# Altium PCB SCMLI_Snipped.PcbDoc (part 1 of 5)
Units mil, origin at the board's own origin, x right, y up, seen from the top; angles counter-clockwise.
Board outline 12129 x 3278 mil, 4 copper layers (Top Layer, GNDPlane, PowRet, Bottom Layer), stack 25.6 mil thick; 452 components, 391 nets, 1786 pads, 827 vias.
Unrouted connection lines stored in the file: 1.
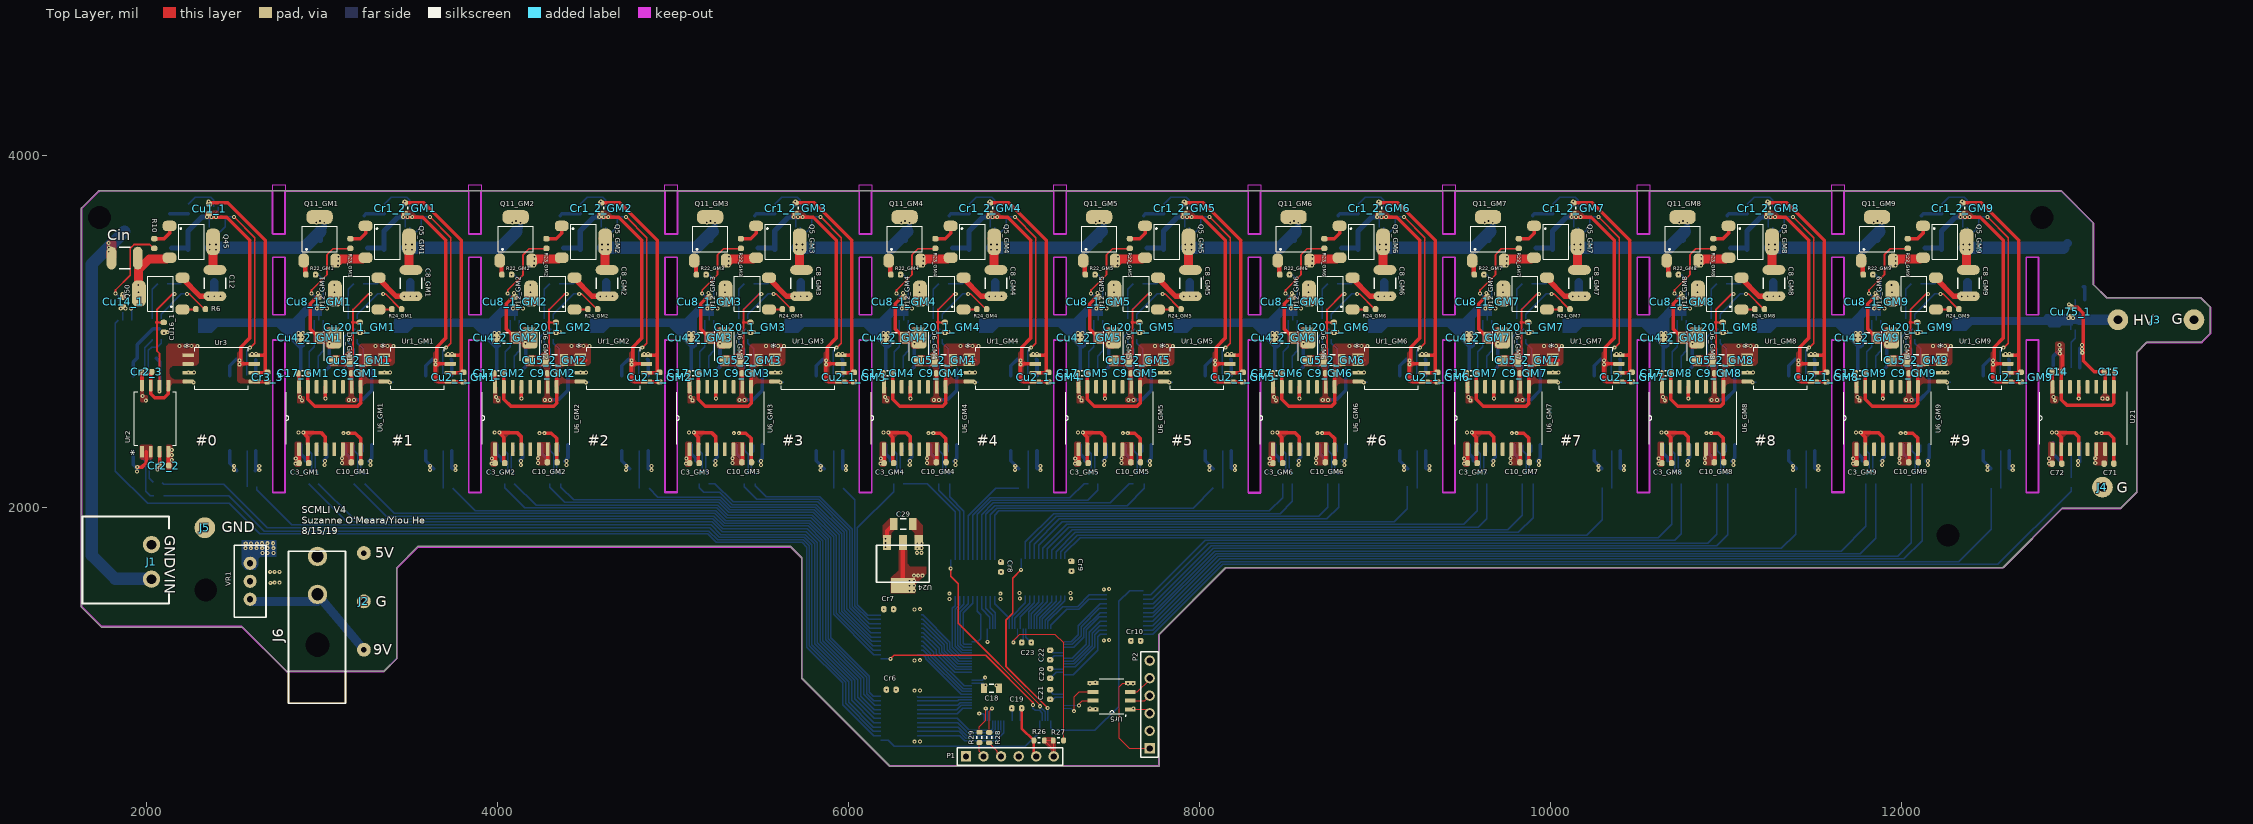
[diagram p0: Top Layer view]
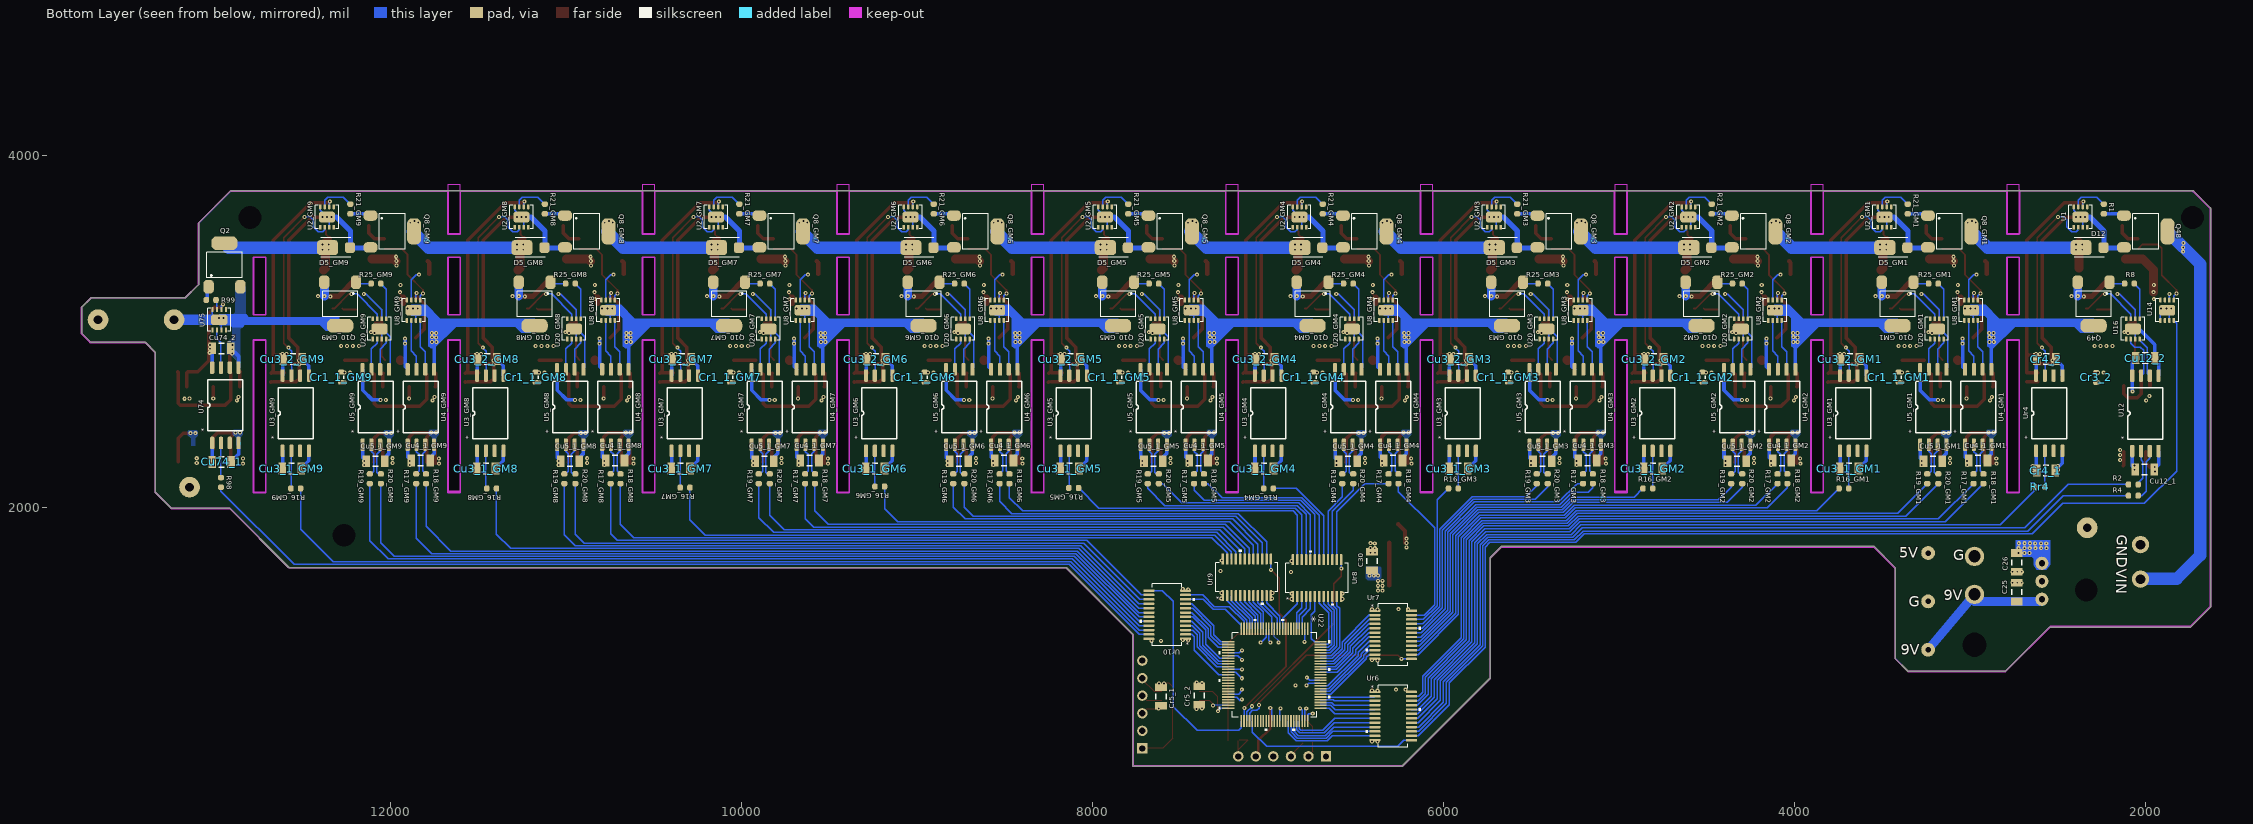
[diagram p1: Bottom Layer view, seen from below]
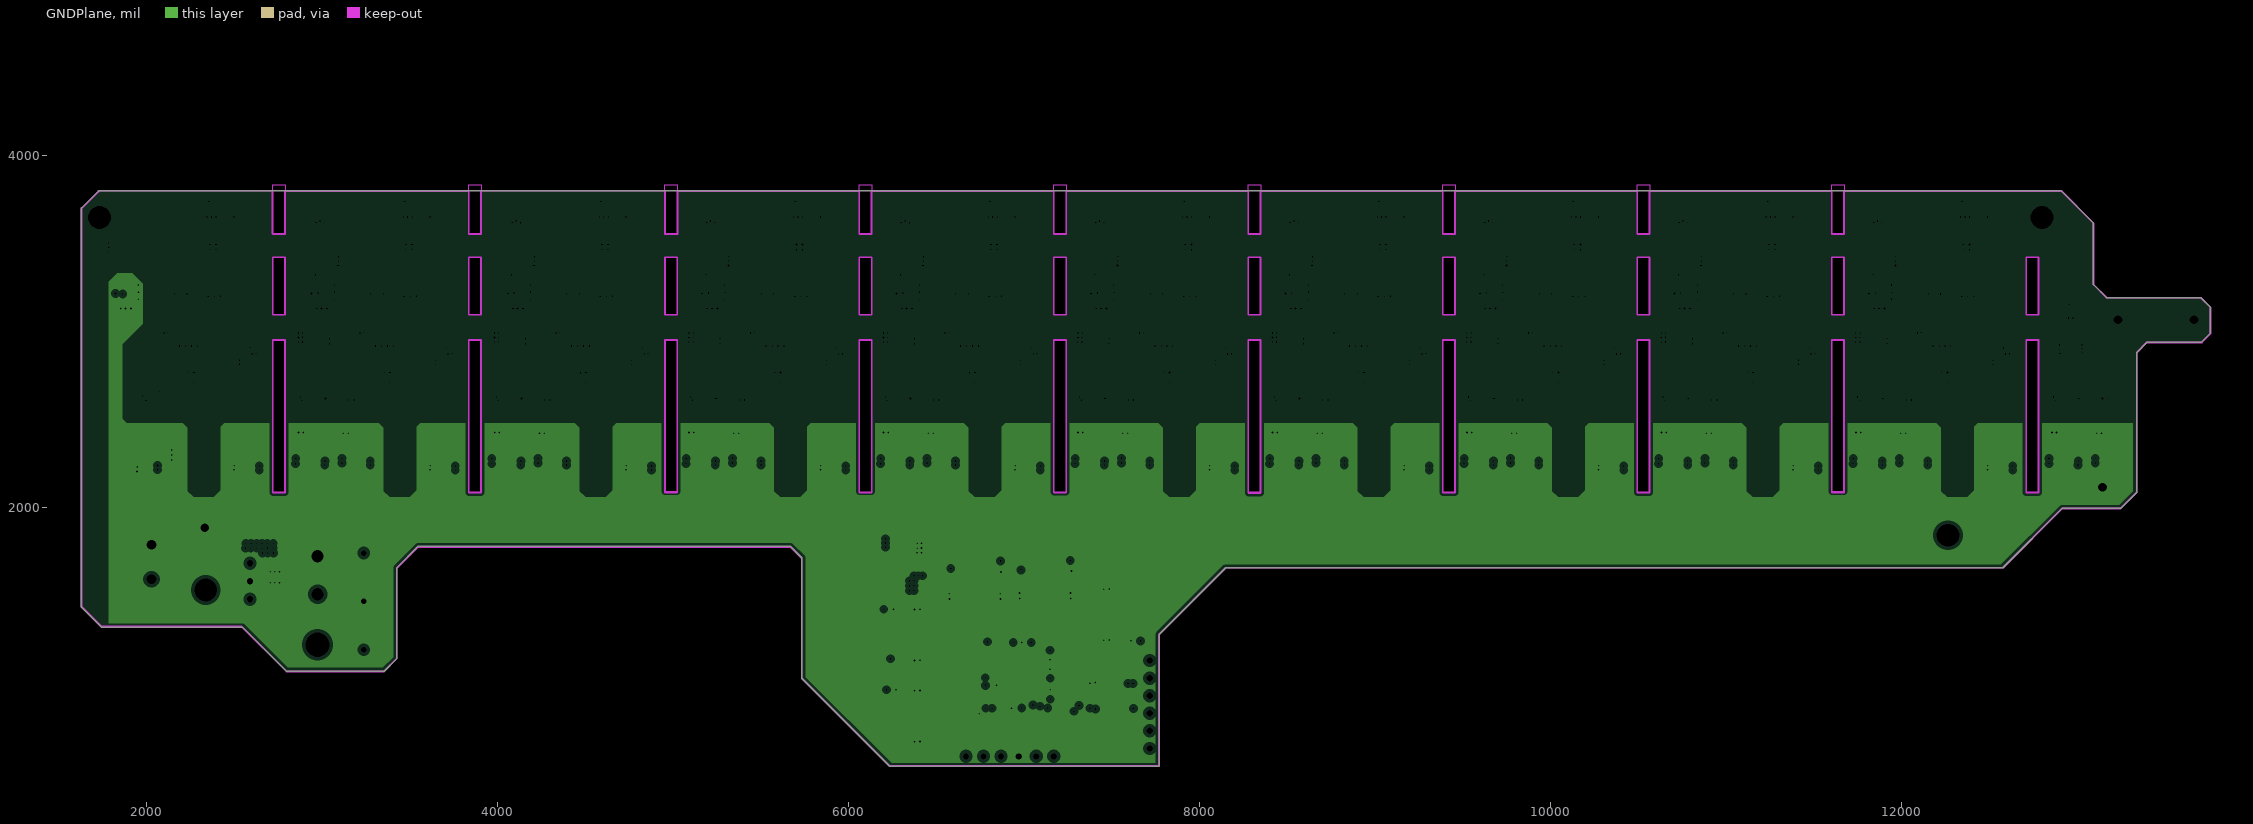
[diagram p2: GNDPlane, clearances drawn from the general rule]
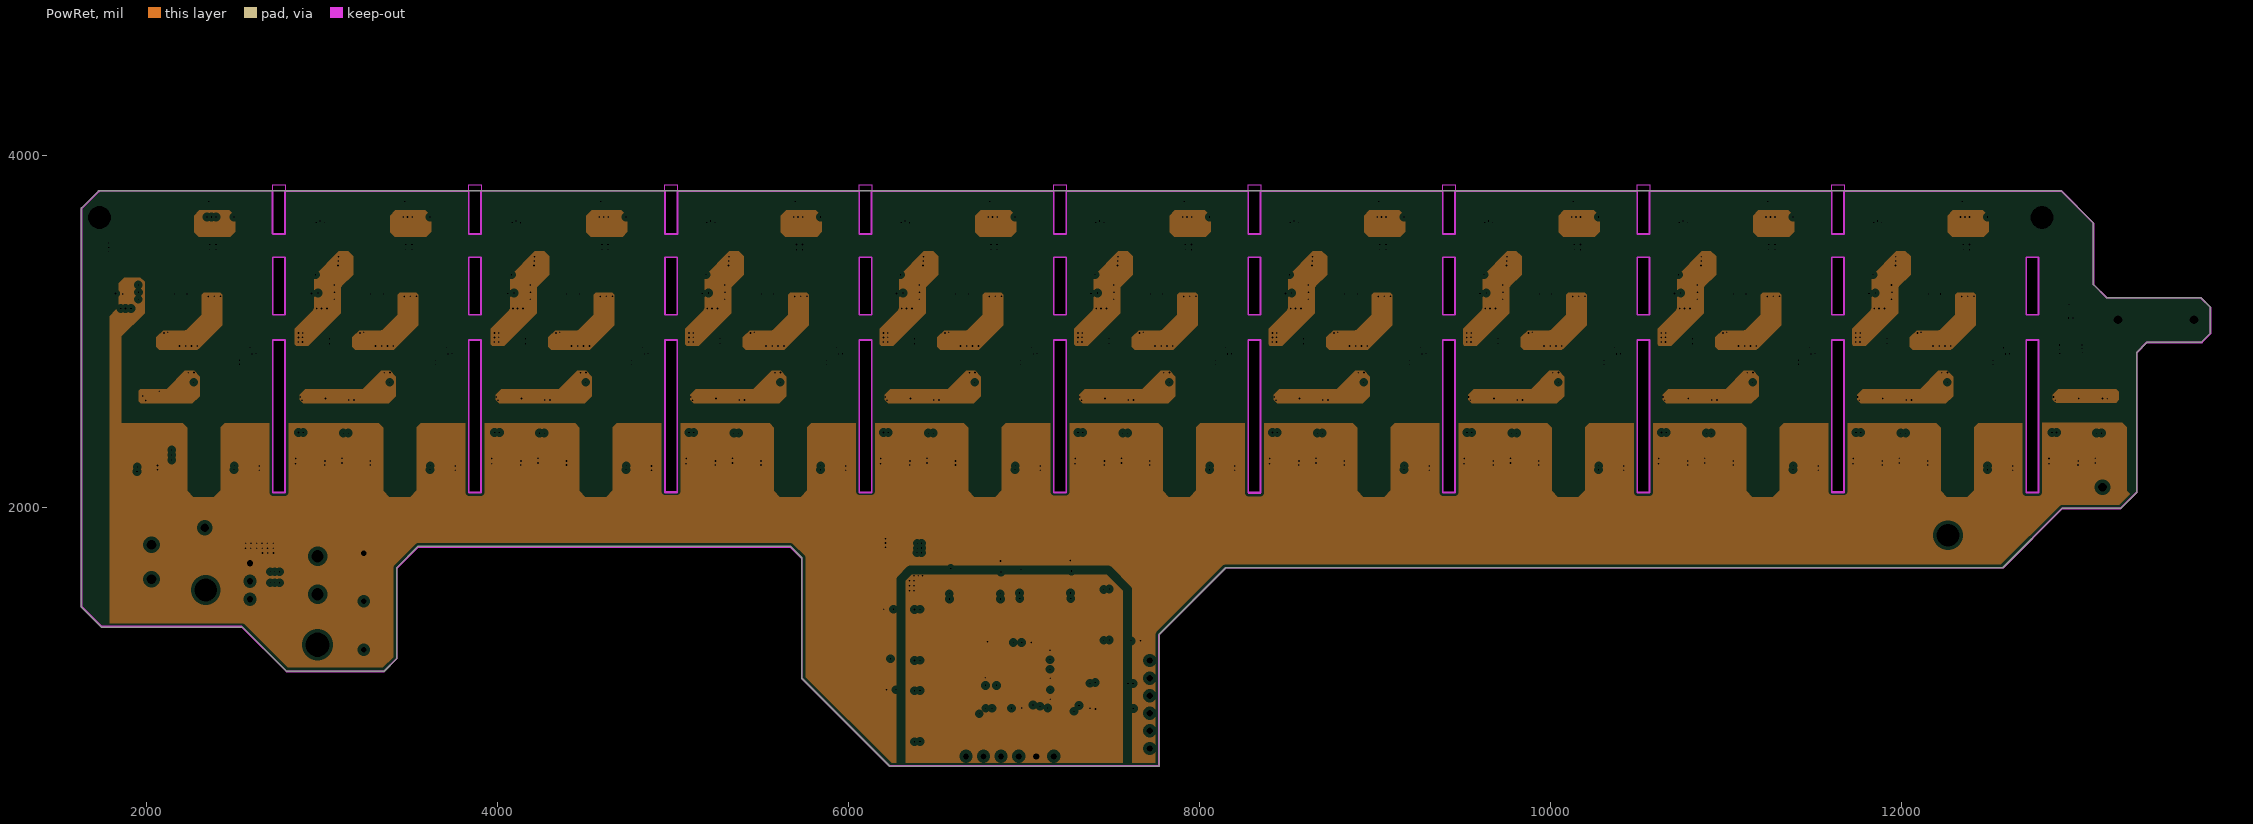
[diagram p3: PowRet, clearances drawn from the general rule]

## Layer stack, top to bottom
Top Solder: solder mask 0.4, Solder Resist, Dk 3.5
Top Layer: signal copper 1.4
Dielectric 1: core 10, FR-4, Dk 4.2
GNDPlane: plane copper 1.4, net GND
Dielectric2: prepreg 5, FR-4, Dk 4.2
PowRet: plane copper 1.4, net (Multiple Nets)
Dielectric 3: prepreg 5, Dk 4.2
Bottom Layer: signal copper 1.4
Bottom Solder: solder mask 0.4, Solder Resist, Dk 3.5

## Board outline
2799.06,1065 3355,1065 3427,1137 3427,1655 3548,1776 5669,1776 5734,1711 5734,1024 6235,523 7770,523 7770,1275 8149,1654 12576,1654 12914,1992 13248,1992 13339,2083 13339,2881 13396,2938 13705,2938 13759,2992 13759,3138 13704,3193 13167,3193 13093,3267 13093,3618 12910,3801 1727,3801 1630,3704 1630,1429 1743,1316 2548.06,1316
cut-out: 2720,3836 2790,3836 2790,3556 2720,3556
cut-out: 2720,3096 2790,3096 2790,3423 2720,3423
cut-out: 2720,2083 2790,2083 2790,2951 2720,2951
cut-out: 12710,3096 12780,3096 12780,3423 12710,3423
cut-out: 12710,2084 12780,2084 12780,2951 12710,2951
cut-out: 11602,3836 11672,3836 11672,3556 11602,3556
cut-out: 11602,3096 11672,3096 11672,3423 11602,3423
cut-out: 11602,2089 11672,2089 11672,2951 11602,2951
cut-out: 10494,3836 10564,3836 10564,3556 10494,3556
cut-out: 10494,3096 10564,3096 10564,3423 10494,3423
cut-out: 10494,2084 10564,2084 10564,2951 10494,2951
cut-out: 9386,3836 9456,3836 9456,3556 9386,3556
cut-out: 9386,3096 9456,3096 9456,3423 9386,3423
cut-out: 9386,2084 9456,2084 9456,2951 9386,2951
cut-out: 8278,3836 8348,3836 8348,3556 8278,3556
cut-out: 8278,3096 8348,3096 8348,3423 8278,3423
cut-out: 8278,2079 8348,2079 8348,2951 8278,2951
cut-out: 7170,3836 7240,3836 7240,3556 7170,3556
cut-out: 7170,3096 7240,3096 7240,3423 7170,3423
cut-out: 7170,2087 7240,2087 7240,2951 7170,2951
cut-out: 6062,3836 6132,3836 6132,3556 6062,3556
cut-out: 6062,3096 6132,3096 6132,3423 6062,3423
cut-out: 6062,2088 6132,2088 6132,2951 6062,2951
cut-out: 4954,3836 5024,3836 5024,3556 4954,3556
cut-out: 4954,3096 5024,3096 5024,3423 4954,3423
cut-out: 4954,2089 5024,2089 5024,2951 4954,2951
cut-out: 3837,2083 3907,2083 3907,2951 3837,2951
cut-out: 3837,3096 3907,3096 3907,3423 3837,3423
cut-out: 3837,3836 3907,3836 3907,3556 3837,3556

## Design rules (kind name [scope] priority, off if disabled: settings)
Clearance TopBottom_Clearance [InNetClass('REFA_toplayer_class') vs InNetClass('Inout_bottomlayer_class')] p1: gap=35 ignorepadtopadclearanceinfootprint=TRUE
Clearance GND_Clearance [InNetClass('GND_Class') vs InNetClass('REFC_class') or InNetClass('REFB_class') or InNetClass('REFA_class') or InNetClass('InOutClass') or InNet('V_IN')] p2: gap=80 ignorepadtopadclearanceinfootprint=TRUE
Clearance REFC_Class_Clearance [InNetClass('REFC_class') vs InNetClass('REFB_class') or InNetClass('REFA_class') or InNetClass('InOutClass') or InNetClass('GND_class')] p3: gap=35 ignorepadtopadclearanceinfootprint=TRUE
Clearance REFB_Class_Clearance [InNetClass('REFB_class') vs InNetClass('GND_Class') or InNetClass('REFC_class') or InNetClass('REFA_class')] p4: gap=35 ignorepadtopadclearanceinfootprint=TRUE
Clearance REFA_Class_Clearance [InNetClass('REFA_class') vs InNetClass('GND_Class') or InNetClass('REFB_class') or InNetClass('REFC_class') or InNetClass('InOutClass')] p5: gap=35 ignorepadtopadclearanceinfootprint=TRUE
Clearance Lv0_Lv1_Clearance [InNetClass('Lv0_class') vs InNetClass('Lv1_class')] p6: gap=35 ignorepadtopadclearanceinfootprint=TRUE
Clearance [All] p7: gap=7 ignorepadtopadclearanceinfootprint=TRUE
HoleSize [All] p1: absolutevalues=TRUE maxlimit=200 minlimit=1 maxpercent=80.000 minpercent=20.000
MinimumAnnularRing [All] p1: minimumring=5
MinimumSolderMaskSliver [All] p1: minsoldermaskwidth=0
PlaneClearance [All] p1: clearance=20
PlaneConnect [All] p1: planeconnectstyle=Direct reliefexpansion=20 reliefentries=4 reliefconductorwidth=10 reliefairgap=10
PolygonConnect [All] p1: connectstyle=Direct reliefconductorwidth=10 reliefentries=4 polygonreliefangle="90 Angle" airgapwidth=10
RoomDefinition SCMLI [InComponentClass('SCMLI')] p1: confinementstyle=ConfineIn formatcopy=TRUE lockcomponents=FALSE outline 1752,1954 13763,1954 13763,3798 1752,3798
RoomDefinition Power [InComponentClass('Power')] p2: confinementstyle=ConfineIn formatcopy=TRUE lockcomponents=FALSE outline 1622,837 6525,837 6525,2030 1622,2030
RoomDefinition MCU [InComponentClass('MCU')] p3: confinementstyle=ConfineIn formatcopy=TRUE lockcomponents=FALSE outline 6113,524 7773,524 7773,1792.5 6113,1792.5
RoomDefinition GM5 [InComponentClass('GM5')] p4: confinementstyle=ConfineIn formatcopy=TRUE lockcomponents=FALSE outline 7231,1988 8278,1988 8278,3778 7231,3778
RoomDefinition GM9 [InComponentClass('GM9')] p5: confinementstyle=ConfineIn formatcopy=TRUE lockcomponents=FALSE outline 11663,1988 12710,1988 12710,3778 11663,3778
RoomDefinition GM8 [InComponentClass('GM8')] p6: confinementstyle=ConfineIn formatcopy=TRUE lockcomponents=FALSE outline 10555,1988 11602,1988 11602,3778 10555,3778
RoomDefinition GM7 [InComponentClass('GM7')] p7: confinementstyle=ConfineIn formatcopy=TRUE lockcomponents=FALSE outline 9447,1988 10494,1988 10494,3778 9447,3778
RoomDefinition GM6 [InComponentClass('GM6')] p8: confinementstyle=ConfineIn formatcopy=TRUE lockcomponents=FALSE outline 8339,1988 9386,1988 9386,3778 8339,3778
RoomDefinition GM4 [InComponentClass('GM4')] p9: confinementstyle=ConfineIn formatcopy=TRUE lockcomponents=FALSE outline 6123,1988 7170,1988 7170,3778 6123,3778
RoomDefinition GM3 [InComponentClass('GM3')] p10: confinementstyle=ConfineIn formatcopy=TRUE lockcomponents=FALSE outline 5015,1988 6062,1988 6062,3778 5015,3778
RoomDefinition GM2 [InComponentClass('GM2')] p11: confinementstyle=ConfineIn formatcopy=TRUE lockcomponents=FALSE outline 3907,1988 4954,1988 4954,3778 3907,3778
RoomDefinition GM1 [InComponentClass('GM1')] p12: confinementstyle=ConfineIn formatcopy=FALSE lockcomponents=FALSE outline 2790,1988 3837,1988 3837,3778 2790,3778
RoutingVias [All] p1: holewidth=10 width=20 viastyle="Through Hole" minholewidth=10 minwidth=20 maxholewidth=28 maxwidth=50
SilkToSilkClearance [All] p1: silktosilkclearance=0
SilkToSolderMaskClearance [IsPad] p1: minsilkscreentomaskgap=0 clearancetoexposedcopper=TRUE
SolderMaskExpansion [All] p1: expansion=4
Width [All] p1: maxlimit=100 minlimit=7 preferedwidth=7
24 further rules are at their usual default settings.

## Classes and differential pairs
net class IN[2..10]: IN2 IN3 IN4 IN5 IN6 IN7 IN8 IN9 IN10 IN11
component class GM1: C3_GM1 C8_GM1 C9_GM1 C10_GM1 C17_GM1 Cr1_1_GM1 Cr1_2_GM1 Cu2_1_GM1 Cu3_1_GM1 Cu3_2_GM1 Cu4_1_GM1 Cu4_2_GM1 Cu5_1_GM1 Cu5_2_GM1 Cu8_1_GM1 Cu20_1_GM1 D5_GM1 D6_GM1 Q5_GM1 Q8_GM1 Q10_GM1 Q11_GM1 Q12_GM1 R16_GM1 R17_GM1 R18_GM1 R19_GM1 R20_GM1 R21_GM1 R22_GM1 R23_GM1 R24_GM1 R25_GM1 U2_GM1 U3_GM1 U4_GM1 U5_GM1 U6_GM1 U8_GM1 U20_GM1 Ur1_GM1
component class GM4: C3_GM4 C8_GM4 C9_GM4 C10_GM4 C17_GM4 Cr1_1_GM4 Cr1_2_GM4 Cu2_1_GM4 Cu3_1_GM4 Cu3_2_GM4 Cu4_1_GM4 Cu4_2_GM4 Cu5_1_GM4 Cu5_2_GM4 Cu8_1_GM4 Cu20_1_GM4 D5_GM4 D6_GM4 Q5_GM4 Q8_GM4 Q10_GM4 Q11_GM4 Q12_GM4 R16_GM4 R17_GM4 R18_GM4 R19_GM4 R20_GM4 R21_GM4 R22_GM4 R23_GM4 R24_GM4 R25_GM4 U2_GM4 U3_GM4 U4_GM4 U5_GM4 U6_GM4 U8_GM4 U20_GM4 Ur1_GM4
component class GM5: C3_GM5 C8_GM5 C9_GM5 C10_GM5 C17_GM5 Cr1_1_GM5 Cr1_2_GM5 Cu2_1_GM5 Cu3_1_GM5 Cu3_2_GM5 Cu4_1_GM5 Cu4_2_GM5 Cu5_1_GM5 Cu5_2_GM5 Cu8_1_GM5 Cu20_1_GM5 D5_GM5 D6_GM5 Q5_GM5 Q8_GM5 Q10_GM5 Q11_GM5 Q12_GM5 R16_GM5 R17_GM5 R18_GM5 R19_GM5 R20_GM5 R21_GM5 R22_GM5 R23_GM5 R24_GM5 R25_GM5 U2_GM5 U3_GM5 U4_GM5 U5_GM5 U6_GM5 U8_GM5 U20_GM5 Ur1_GM5
component class GM6: C3_GM6 C8_GM6 C9_GM6 C10_GM6 C17_GM6 Cr1_1_GM6 Cr1_2_GM6 Cu2_1_GM6 Cu3_1_GM6 Cu3_2_GM6 Cu4_1_GM6 Cu4_2_GM6 Cu5_1_GM6 Cu5_2_GM6 Cu8_1_GM6 Cu20_1_GM6 D5_GM6 D6_GM6 Q5_GM6 Q8_GM6 Q10_GM6 Q11_GM6 Q12_GM6 R16_GM6 R17_GM6 R18_GM6 R19_GM6 R20_GM6 R21_GM6 R22_GM6 R23_GM6 R24_GM6 R25_GM6 U2_GM6 U3_GM6 U4_GM6 U5_GM6 U6_GM6 U8_GM6 U20_GM6 Ur1_GM6
component class GM7: C3_GM7 C8_GM7 C9_GM7 C10_GM7 C17_GM7 Cr1_1_GM7 Cr1_2_GM7 Cu2_1_GM7 Cu3_1_GM7 Cu3_2_GM7 Cu4_1_GM7 Cu4_2_GM7 Cu5_1_GM7 Cu5_2_GM7 Cu8_1_GM7 Cu20_1_GM7 D5_GM7 D6_GM7 Q5_GM7 Q8_GM7 Q10_GM7 Q11_GM7 Q12_GM7 R16_GM7 R17_GM7 R18_GM7 R19_GM7 R20_GM7 R21_GM7 R22_GM7 R23_GM7 R24_GM7 R25_GM7 U2_GM7 U3_GM7 U4_GM7 U5_GM7 U6_GM7 U8_GM7 U20_GM7 Ur1_GM7
component class GM9: C3_GM9 C8_GM9 C9_GM9 C10_GM9 C17_GM9 Cr1_1_GM9 Cr1_2_GM9 Cu2_1_GM9 Cu3_1_GM9 Cu3_2_GM9 Cu4_1_GM9 Cu4_2_GM9 Cu5_1_GM9 Cu5_2_GM9 Cu8_1_GM9 Cu20_1_GM9 D4_GM10 D5_GM9 D5_GM10 D6_GM9 Q5_GM9 Q5_GM10 Q8_GM9 Q10_GM9 Q10_GM10 Q11_GM9 Q11_GM10 Q12_GM9 R16_GM9 R17_GM9 R18_GM9 R19_GM9 R20_GM9 R21_GM9 R22_GM9 R23_GM9 R24_GM9 R25_GM9 U2_GM9 U3_GM9 U4_GM9 U5_GM9 U6_GM9 U8_GM9 U20_GM9 Ur1_GM9
component class MCU: C18 C19 C20 C21 C22 C23 Cr5_1 Cr5_2 Cr6 Cr7 Cr8 Cr9 Cr10 P1 P2 R26 R27 R28 R29 U22 Ur5 Ur6 Ur7 Ur8 Ur9 Ur10
component class Power: C25 C26 C29 C30 J1 J2 J5 J6 U24 VR1
component class SCMLI: C12 C14 C15 C71 C72 Cin Cr2_2 Cr2_3 Cr3_2 Cr3_3 Cr4_1 Cr4_2 Cu1_1 Cu12_1 Cu12_2 Cu14_1 Cu16_1 Cu74_1 Cu74_2 Cu75_1 D12 J3 J4 Q2 Q45 Q48 Q49 Q50 R1 R2 R4 R6 R8 R10 R98 R99 Rr4 U1 U12 U14 U16 U21 U74 U75 Ur2 Ur3 Ur4
net class OUT_LOW[2..10]: OUT_LOW2 OUT_LOW3 OUT_LOW4 OUT_LOW5 OUT_LOW6 OUT_LOW7 OUT_LOW8 OUT_LOW9 OUT_LOW10
net class REFB[2..10]: REFB2
net class SW_A[1..10]: SW_A1 SW_A2 SW_A3 SW_A4 SW_A5 SW_A6 SW_A7 SW_A8 SW_A9 SW_A10
net class SW_B[2..11]: SW_B2 SW_B3 SW_B4 SW_B5 SW_B6 SW_B7 SW_B8 SW_B9 SW_B10 SW_B11
net class SW_C[1..10]: SW_C1 SW_C2 SW_C3 SW_C4 SW_C5 SW_C6 SW_C7 SW_C8 SW_C9 SW_C10
net class SW_D[1..10]: SW_D1 SW_D2 SW_D3 SW_D4 SW_D5 SW_D6 SW_D7 SW_D8 SW_D9 SW_D10
net class SW_E[1..10]: SW_E1 SW_E2 SW_E3 SW_E4 SW_E5 SW_E6 SW_E7 SW_E8 SW_E9 SW_E10
channel class Generic_Module: GM1 GM2 GM3 GM4 GM5 GM6 GM7 GM8 GM9
component class GM2: C3_GM2 C8_GM2 C9_GM2 C10_GM2 C17_GM2 Cr1_1_GM2 Cr1_2_GM2 Cu2_1_GM2 Cu3_1_GM2 Cu3_2_GM2 Cu4_1_GM2 Cu4_2_GM2 Cu5_1_GM2 Cu5_2_GM2 Cu8_1_GM2 Cu20_1_GM2 D5_GM2 D6_GM2 Q5_GM2 Q8_GM2 Q10_GM2 Q11_GM2 Q12_GM2 R16_GM2 R17_GM2 R18_GM2 R19_GM2 R20_GM2 R21_GM2 R22_GM2 R23_GM2 R24_GM2 R25_GM2 U2_GM2 U3_GM2 U4_GM2 U5_GM2 U6_GM2 U8_GM2 U20_GM2 Ur1_GM2
component class GM3: C3_GM3 C8_GM3 C9_GM3 C10_GM3 C17_GM3 Cr1_1_GM3 Cr1_2_GM3 Cu2_1_GM3 Cu3_1_GM3 Cu3_2_GM3 Cu4_1_GM3 Cu4_2_GM3 Cu5_1_GM3 Cu5_2_GM3 Cu8_1_GM3 Cu20_1_GM3 D5_GM3 D6_GM3 Q5_GM3 Q8_GM3 Q10_GM3 Q11_GM3 Q12_GM3 R16_GM3 R17_GM3 R18_GM3 R19_GM3 R20_GM3 R21_GM3 R22_GM3 R23_GM3 R24_GM3 R25_GM3 U2_GM3 U3_GM3 U4_GM3 U5_GM3 U6_GM3 U8_GM3 U20_GM3 Ur1_GM3
component class GM8: C3_GM8 C8_GM8 C9_GM8 C10_GM8 C17_GM8 Cr1_1_GM8 Cr1_2_GM8 Cu2_1_GM8 Cu3_1_GM8 Cu3_2_GM8 Cu4_1_GM8 Cu4_2_GM8 Cu5_1_GM8 Cu5_2_GM8 Cu8_1_GM8 Cu20_1_GM8 D5_GM8 D6_GM8 Q5_GM8 Q8_GM8 Q10_GM8 Q11_GM8 Q12_GM8 R16_GM8 R17_GM8 R18_GM8 R19_GM8 R20_GM8 R21_GM8 R22_GM8 R23_GM8 R24_GM8 R25_GM8 U2_GM8 U3_GM8 U4_GM8 U5_GM8 U6_GM8 U8_GM8 U20_GM8 Ur1_GM8
net class GND_class: 3V3 9V +5V SW_A1 SW_A1_uC SW_A2 SW_A2_uC SW_A3 SW_A3_uC SW_A4 SW_A4_uC SW_A5 SW_A5_uC SW_A6 SW_A6_uC SW_A7 SW_A7_uC SW_A8 SW_A8_uC SW_A9 SW_A9_uC SW_A10 SW_A10_uC SW_B2 SW_B2_uC SW_B3 SW_B3_uC SW_B4 SW_B4_uC SW_B5 SW_B5_uC SW_B6 SW_B6_uC SW_B7 SW_B7_uC SW_B8 SW_B8_uC SW_B9 SW_B9_uC SW_B10 SW_B10_uC SW_B11 SW_B11_uC SW_C1 SW_C1_uC SW_C2 SW_C2_uC SW_C3 SW_C3_uC SW_C4 SW_C4_uC SW_C5 SW_C5_uC SW_C6 SW_C6_uC SW_C7 SW_C7_uC SW_C8 SW_C8_uC SW_C9 SW_C9_uC SW_C10 SW_C10_uC SW_D1 SW_D1_uC SW_D2 SW_D2_uC SW_D3 SW_D3_uC SW_D4 SW_D4_uC SW_D5 SW_D5_uC SW_D6 SW_D6_uC SW_D7 SW_D7_uC SW_D8 SW_D8_uC SW_D9 SW_D9_uC SW_D10 SW_D10_uC SW_E1 SW_E1_uC SW_E2 SW_E2_uC SW_E3 SW_E3_uC SW_E4 SW_E4_uC SW_E5 SW_E5_uC SW_E6 SW_E6_uC SW_E7 SW_E7_uC SW_E8 SW_E8_uC SW_E9 SW_E9_uC SW_E10 SW_E10_uC
net class REFC_class: GATE_D1 GATE_D_GM1 GATE_D_GM2 GATE_D_GM3 GATE_D_GM4 GATE_D_GM5 GATE_D_GM6 GATE_D_GM7 GATE_D_GM8 GATE_D_GM9 GATE_E1 GATE_E_GM1 GATE_E_GM2 GATE_E_GM3 GATE_E_GM4 GATE_E_GM5 GATE_E_GM6 GATE_E_GM7 GATE_E_GM8 GATE_E_GM9 ISO_D1 ISO_D_GM1 ISO_D_GM2 ISO_D_GM3 ISO_D_GM4 ISO_D_GM5 ISO_D_GM6 ISO_D_GM7 ISO_D_GM8 ISO_D_GM9 ISO_E1 ISO_E_GM1 ISO_E_GM2 ISO_E_GM3 ISO_E_GM4 ISO_E_GM5 ISO_E_GM6 ISO_E_GM7 ISO_E_GM8 ISO_E_GM9 NetR6_1 NetR8_1 NetR24_GM1_1 NetR24_GM2_1 NetR24_GM3_1 NetR24_GM4_1 NetR24_GM5_1 NetR24_GM6_1 NetR24_GM7_1 NetR24_GM8_1 NetR24_GM9_1 NetR25_GM1_1 NetR25_GM2_1 NetR25_GM3_1 NetR25_GM4_1 NetR25_GM5_1 NetR25_GM6_1 NetR25_GM7_1 NetR25_GM8_1 NetR25_GM9_1 REFC1 REFC1_5V REFC_5V_GM1 REFC_5V_GM2 REFC_5V_GM3 REFC_5V_GM4 REFC_5V_GM5 REFC_5V_GM6 REFC_5V_GM7 REFC_5V_GM8 REFC_5V_GM9 REFC_GM1 REFC_GM2 REFC_GM3 REFC_GM4 REFC_GM5 REFC_GM6 REFC_GM7 REFC_GM8 REFC_GM9
net class REFB_class: GATE_B11 GATE_B_GM1 GATE_B_GM2 GATE_B_GM3 GATE_B_GM4 GATE_B_GM5 GATE_B_GM6 GATE_B_GM7 GATE_B_GM8 GATE_B_GM9 GATE_C1 GATE_C_GM1 GATE_C_GM2 GATE_C_GM3 GATE_C_GM4 GATE_C_GM5 GATE_C_GM6 GATE_C_GM7 GATE_C_GM8 GATE_C_GM9 ISO_B11 ISO_B_GM1 ISO_B_GM2 ISO_B_GM3 ISO_B_GM4 ISO_B_GM5 ISO_B_GM6 ISO_B_GM7 ISO_B_GM8 ISO_B_GM9 ISO_C_GM1 ISO_C_GM2 ISO_C_GM3 ISO_C_GM4 ISO_C_GM5 ISO_C_GM6 ISO_C_GM7 ISO_C_GM8 ISO_C_GM9 NetR22_GM1_1 NetR22_GM2_1 NetR22_GM3_1 NetR22_GM4_1 NetR22_GM5_1 NetR22_GM6_1 NetR22_GM7_1 NetR22_GM8_1 NetR22_GM9_1 NetR23_GM1_1 NetR23_GM2_1 NetR23_GM3_1 NetR23_GM4_1 NetR23_GM5_1 NetR23_GM6_1 NetR23_GM7_1 NetR23_GM8_1 NetR23_GM9_1 NetR99_1 OUT_LOW2 OUT_LOW3 OUT_LOW4 OUT_LOW5 OUT_LOW6 OUT_LOW7 OUT_LOW8 OUT_LOW9 OUT_LOW10 REFB2 REFB11_5V REFB_5V_GM1 REFB_5V_GM2 REFB_5V_GM3 REFB_5V_GM4 REFB_5V_GM5 REFB_5V_GM6 REFB_5V_GM7 REFB_5V_GM8 REFB_5V_GM9
net class REFA_class: GATE_A1 GATE_A_GM1 GATE_A_GM2 GATE_A_GM3 GATE_A_GM4 GATE_A_GM5 GATE_A_GM6 GATE_A_GM7 GATE_A_GM8 GATE_A_GM9 ISO_A1 ISO_A_GM1 ISO_A_GM2 ISO_A_GM3 ISO_A_GM4 ISO_A_GM5 ISO_A_GM6 ISO_A_GM7 ISO_A_GM8 ISO_A_GM9 NetR1_1 NetR21_GM1_1 NetR21_GM2_1 NetR21_GM3_1 NetR21_GM4_1 NetR21_GM5_1 NetR21_GM6_1 NetR21_GM7_1 NetR21_GM8_1 NetR21_GM9_1 REFA1 REFA1_5V REFA_5V_GM1 REFA_5V_GM2 REFA_5V_GM3 REFA_5V_GM4 REFA_5V_GM5 REFA_5V_GM6 REFA_5V_GM7 REFA_5V_GM8 REFA_5V_GM9 REFA_GM1 REFA_GM2 REFA_GM3 REFA_GM4 REFA_GM5 REFA_GM6 REFA_GM7 REFA_GM8 REFA_GM9
net class InOutClass: IN2 IN3 IN4 IN5 IN6 IN7 IN8 IN9 IN10 IN11 OUT_LOW2 OUT_LOW3 OUT_LOW4 OUT_LOW5 OUT_LOW6 OUT_LOW7 OUT_LOW8 OUT_LOW9 OUT_LOW10 REFB2 V_IN
net class Lv0_class: IN2 ISO_A1 ISO_D1 ISO_E1 NetR1_1 NetR6_1 NetR8_1 NetR10_1 REFA1 REFA1_5V REFC1 REFC1_5V SW_C1 V_IN
net class Lv1_class: GATE_A_GM1 GATE_B_GM1 GATE_C_GM1 GATE_D_GM1 GATE_E_GM1 ISO_A_GM1 ISO_B_GM1 ISO_C_GM1 ISO_D_GM1 ISO_E_GM1 NetR16_GM1_1 NetR17_GM1_1 NetR18_GM1_2 NetR19_GM1_1 NetR20_GM1_1 NetR21_GM1_1 NetR22_GM1_1 NetR23_GM1_1 NetR24_GM1_1 NetR25_GM1_1 REFA_5V_GM1 REFA_GM1 REFB_5V_GM1 REFC_5V_GM1 REFC_GM1
net class REFA_toplayer_class: ISO_A1 ISO_A_GM1 ISO_A_GM2 ISO_A_GM3 ISO_A_GM4 ISO_A_GM5 ISO_A_GM6 ISO_A_GM7 ISO_A_GM8 ISO_A_GM9 REFA1 REFA1_5V REFA_5V_GM1 REFA_5V_GM2 REFA_5V_GM3 REFA_5V_GM4 REFA_5V_GM5 REFA_5V_GM6 REFA_5V_GM7 REFA_5V_GM8 REFA_5V_GM9 REFA_GM1 REFA_GM2 REFA_GM3 REFA_GM4 REFA_GM5 REFA_GM6 REFA_GM7 REFA_GM8 REFA_GM9
net class Inout_bottomlayer_class: IN2 IN3 IN4 IN5 IN6 IN7 IN8 IN9 IN10 IN11 OUT_LOW2 OUT_LOW3 OUT_LOW4 OUT_LOW5 OUT_LOW6 OUT_LOW7 OUT_LOW8 OUT_LOW9 OUT_LOW10 REFB2

## Components (designator, comment, footprint, x,y, rotation, side; value= is the part's Value field where it differs from the comment)
C3_GM1 "Cap Semi" 1608[0603] 2897,2250.17 r180 top value=10uF (schematic designator C3)
C3_GM2 "Cap Semi" 1608[0603] 4014,2250.17 r180 top value=10uF (schematic designator C3)
C3_GM3 "Cap Semi" 1608[0603] 5122,2250.17 r180 top value=10uF (schematic designator C3)
C3_GM4 "Cap Semi" 1608[0603] 6230,2250.17 r180 top value=10uF (schematic designator C3)
C3_GM5 "Cap Semi" 1608[0603] 7338,2250.17 r180 top value=10uF (schematic designator C3)
C3_GM6 "Cap Semi" 1608[0603] 8446,2250.17 r180 top value=10uF (schematic designator C3)
C3_GM7 "Cap Semi" 1608[0603] 9554,2250.17 r180 top value=10uF (schematic designator C3)
C3_GM8 "Cap Semi" 1608[0603] 10662,2250.17 r180 top value=10uF (schematic designator C3)
C3_GM9 "Cap Semi" 1608[0603] 11770,2250.17 r180 top value=10uF (schematic designator C3)
C8_GM1 "Cap Semi" 1812 3507.29,3276 r90 top value=150nF (schematic designator C8)
C8_GM2 "Cap Semi" 1812 4624.29,3276 r90 top value=150nF (schematic designator C8)
C8_GM3 "Cap Semi" 1812 5732.29,3276 r90 top value=150nF (schematic designator C8)
C8_GM4 "Cap Semi" 1812 6840.29,3276 r90 top value=150nF (schematic designator C8)
C8_GM5 "Cap Semi" 1812 7948.29,3276 r90 top value=150nF (schematic designator C8)
C8_GM6 "Cap Semi" 1812 9056.29,3276 r90 top value=150nF (schematic designator C8)
C8_GM7 "Cap Semi" 1812 10164.29,3276 r90 top value=150nF (schematic designator C8)
C8_GM8 "Cap Semi" 1812 11272.29,3276 r90 top value=150nF (schematic designator C8)
C8_GM9 "Cap Semi" 1812 12380.29,3276 r90 top value=150nF (schematic designator C8)
C9_GM1 "Cap Semi" J1-0603 3197,2762 r180 top value=10uF (schematic designator C9)
C9_GM2 "Cap Semi" J1-0603 4314,2762 r180 top value=10uF (schematic designator C9)
C9_GM3 "Cap Semi" J1-0603 5422,2762 r180 top value=10uF (schematic designator C9)
C9_GM4 "Cap Semi" J1-0603 6530,2762 r180 top value=10uF (schematic designator C9)
C9_GM5 "Cap Semi" J1-0603 7638,2762 r180 top value=10uF (schematic designator C9)
C9_GM6 "Cap Semi" J1-0603 8746,2762 r180 top value=10uF (schematic designator C9)
C9_GM7 "Cap Semi" J1-0603 9854,2762 r180 top value=10uF (schematic designator C9)
C9_GM8 "Cap Semi" J1-0603 10962,2762 r180 top value=10uF (schematic designator C9)
C9_GM9 "Cap Semi" J1-0603 12070,2762 r180 top value=10uF (schematic designator C9)
C10_GM1 "Cap Semi" 1608[0603] 3195,2255.17 r180 top value=10uF (schematic designator C10)
C10_GM2 "Cap Semi" 1608[0603] 4312,2255.17 r180 top value=10uF (schematic designator C10)
C10_GM3 "Cap Semi" 1608[0603] 5420,2255.17 r180 top value=10uF (schematic designator C10)
C10_GM4 "Cap Semi" 1608[0603] 6528,2255.17 r180 top value=10uF (schematic designator C10)
C10_GM5 "Cap Semi" 1608[0603] 7636,2255.17 r180 top value=10uF (schematic designator C10)
C10_GM6 "Cap Semi" 1608[0603] 8744,2255.17 r180 top value=10uF (schematic designator C10)
C10_GM7 "Cap Semi" 1608[0603] 9852,2255.17 r180 top value=10uF (schematic designator C10)
C10_GM8 "Cap Semi" 1608[0603] 10960,2255.17 r180 top value=10uF (schematic designator C10)
C10_GM9 "Cap Semi" 1608[0603] 12068,2255.17 r180 top value=10uF (schematic designator C10)
C12 "Cap Semi" 1812 2390.29,3276 r90 top value=150nF
C14 "Cap Semi" J1-0603 12886,2771 r180 top value=0.1uF
C15 "Cap Semi" J1-0603 13183,2770 r180 top value=0.1uF
C17_GM1 "Cap Semi" J1-0603 2894,2762 r180 top value=10uF (schematic designator C17)
C17_GM2 "Cap Semi" J1-0603 4011,2762 r180 top value=10uF (schematic designator C17)
C17_GM3 "Cap Semi" J1-0603 5119,2762 r180 top value=10uF (schematic designator C17)
C17_GM4 "Cap Semi" J1-0603 6227,2762 r180 top value=10uF (schematic designator C17)
C17_GM5 "Cap Semi" J1-0603 7335,2762 r180 top value=10uF (schematic designator C17)
C17_GM6 "Cap Semi" J1-0603 8443,2762 r180 top value=10uF (schematic designator C17)
C17_GM7 "Cap Semi" J1-0603 9551,2762 r180 top value=10uF (schematic designator C17)
C17_GM8 "Cap Semi" J1-0603 10659,2762 r180 top value=10uF (schematic designator C17)
C17_GM9 "Cap Semi" J1-0603 11767,2762 r180 top value=10uF (schematic designator C17)
C18 "Cap Semi" 0805 6815,968 r0 top value=22uF
C19 "Cap Semi" 1608[0603] 6958.5,853.5 r0 top value=0.1uF
C20 "Cap Semi" 1608[0603] 7149,1052 r270 top value=0.1uF
C21 "Cap Semi" 1608[0603] 7149,932 r270 top value=0.1uF
C22 "Cap Semi" 1608[0603] 7149,1157 r90 top value=0.1uF
C23 "Cap Semi" 1608[0603] 7014,1228 r0 top value=0.1uF
C25 "Cap Semi" C1206 2734,1514.7 r270 bottom value=0.33uF
C26 "Cap Semi" C1206 2734,1685 r90 bottom value=0.1uF
C29 "Cap Semi" C1206 6312,1903 r180 top value=1uF
C30 "Cap Semi" C1206 6408,1692 r270 bottom value=1uF
C71 "Cap Semi" 1608[0603] 13181.44,2247 r180 top value=10uF
C72 "Cap Semi" 1608[0603] 12885,2247 r180 top value=10uF
Cin "Cap Semi" 1812 1876,3418 r180 top value=150nF
Cr1_1_GM1 "Cap Semi" J1-0603 3407,2740 r90 bottom value=0.1u (schematic designator Cr1_1)
Cr1_1_GM2 "Cap Semi" J1-0603 4524,2740 r90 bottom value=0.1u (schematic designator Cr1_1)
Cr1_1_GM3 "Cap Semi" J1-0603 5632,2740 r90 bottom value=0.1u (schematic designator Cr1_1)
Cr1_1_GM4 "Cap Semi" J1-0603 6740,2740 r90 bottom value=0.1u (schematic designator Cr1_1)
Cr1_1_GM5 "Cap Semi" J1-0603 7848,2740 r90 bottom value=0.1u (schematic designator Cr1_1)
Cr1_1_GM6 "Cap Semi" J1-0603 8956,2740 r90 bottom value=0.1u (schematic designator Cr1_1)
Cr1_1_GM7 "Cap Semi" J1-0603 10064,2740 r90 bottom value=0.1u (schematic designator Cr1_1)
Cr1_1_GM8 "Cap Semi" J1-0603 11172,2740 r90 bottom value=0.1u (schematic designator Cr1_1)
Cr1_1_GM9 "Cap Semi" J1-0603 12280,2740 r90 bottom value=0.1u (schematic designator Cr1_1)
Cr1_2_GM1 "Cap Semi" J1-0603 3474,3703 r90 top value=0.1u (schematic designator Cr1_2)
Cr1_2_GM2 "Cap Semi" J1-0603 4591,3703 r90 top value=0.1u (schematic designator Cr1_2)
Cr1_2_GM3 "Cap Semi" J1-0603 5699,3703 r90 top value=0.1u (schematic designator Cr1_2)
Cr1_2_GM4 "Cap Semi" J1-0603 6807,3703 r90 top value=0.1u (schematic designator Cr1_2)
Cr1_2_GM5 "Cap Semi" J1-0603 7915,3703 r90 top value=0.1u (schematic designator Cr1_2)
Cr1_2_GM6 "Cap Semi" J1-0603 9023,3703 r90 top value=0.1u (schematic designator Cr1_2)
Cr1_2_GM7 "Cap Semi" J1-0603 10131,3703 r90 top value=0.1u (schematic designator Cr1_2)
Cr1_2_GM8 "Cap Semi" J1-0603 11239,3703 r90 top value=0.1u (schematic designator Cr1_2)
Cr1_2_GM9 "Cap Semi" J1-0603 12347,3703 r90 top value=0.1u (schematic designator Cr1_2)
Cr2_2 "Cap Semi" 1608[0603] 2100,2236 r180 top value=0.1u
Cr2_3 "Cap Semi" J1-0603 2002,2770 r180 top value=0.1u
Cr3_2 "Cap Semi" 1608[0603] 2281,2738 r90 bottom value=0.1u
Cr3_3 "Cap Semi" 1608[0603] 2690,2740 r90 top value=0.1u
Cr4_1 "Cap Semi" C1206 2568,2208 r0 bottom value=0.1u
Cr4_2 "Cap Semi" C1206 2566,2843 r0 bottom value=0.1u
Cr5_1 "Cap Semi" C1206 7610,920 r90 bottom value=47n
Cr5_2 "Cap Semi" C1206 7392,926 r270 bottom value=47n
Cr6 "Cap Semi" 1608[0603] 6243.5,959.5 r180 top value=0.1uF
Cr7 "Cap Semi" 1608[0603] 6229,1418 r180 top value=0.1uF
Cr8 "Cap Semi" 1608[0603] 6869.5,1657.5 r90 top value=0.1uF
Cr9 "Cap Semi" 1608[0603] 7270.5,1662.5 r90 top value=0.1uF
Cr10 "Cap Semi" 1608[0603] 7636.5,1237.5 r0 top value=0.1uF
Cu1_1 "Cap Semi" 1608[0603] 2357,3698 r90 top value=2.2u
Cu2_1_GM1 "Cap Semi" 1608[0603] 3807,2740 r90 top value=2.2u (schematic designator Cu2_1)
Cu2_1_GM2 "Cap Semi" 1608[0603] 4924,2740 r90 top value=2.2u (schematic designator Cu2_1)
Cu2_1_GM3 "Cap Semi" 1608[0603] 6032,2740 r90 top value=2.2u (schematic designator Cu2_1)
Cu2_1_GM4 "Cap Semi" 1608[0603] 7140,2740 r90 top value=2.2u (schematic designator Cu2_1)
Cu2_1_GM5 "Cap Semi" 1608[0603] 8248,2740 r90 top value=2.2u (schematic designator Cu2_1)
Cu2_1_GM6 "Cap Semi" 1608[0603] 9356,2740 r90 top value=2.2u (schematic designator Cu2_1)
Cu2_1_GM7 "Cap Semi" 1608[0603] 10464,2740 r90 top value=2.2u (schematic designator Cu2_1)
Cu2_1_GM8 "Cap Semi" 1608[0603] 11572,2740 r90 top value=2.2u (schematic designator Cu2_1)
Cu2_1_GM9 "Cap Semi" 1608[0603] 12680,2740 r90 top value=2.2u (schematic designator Cu2_1)
Cu3_1_GM1 "Cap Semi" C1206 3689,2219 r0 bottom value=0.1u (schematic designator Cu3_1)
Cu3_1_GM2 "Cap Semi" C1206 4806,2219 r0 bottom value=0.1u (schematic designator Cu3_1)
Cu3_1_GM3 "Cap Semi" C1206 5914,2219 r0 bottom value=0.1u (schematic designator Cu3_1)
Cu3_1_GM4 "Cap Semi" C1206 7022,2219 r0 bottom value=0.1u (schematic designator Cu3_1)
Cu3_1_GM5 "Cap Semi" C1206 8130,2219 r0 bottom value=0.1u (schematic designator Cu3_1)
Cu3_1_GM6 "Cap Semi" C1206 9238,2219 r0 bottom value=0.1u (schematic designator Cu3_1)
Cu3_1_GM7 "Cap Semi" C1206 10346,2219 r0 bottom value=0.1u (schematic designator Cu3_1)
Cu3_1_GM8 "Cap Semi" C1206 11454,2219 r0 bottom value=0.1u (schematic designator Cu3_1)
Cu3_1_GM9 "Cap Semi" C1206 12562,2219 r0 bottom value=0.1u (schematic designator Cu3_1)
Cu3_2_GM1 "Cap Semi" C1206 3683,2843 r0 bottom value=0.1u (schematic designator Cu3_2)
Cu3_2_GM2 "Cap Semi" C1206 4800,2843 r0 bottom value=0.1u (schematic designator Cu3_2)
Cu3_2_GM3 "Cap Semi" C1206 5908,2843 r0 bottom value=0.1u (schematic designator Cu3_2)
Cu3_2_GM4 "Cap Semi" C1206 7016,2843 r0 bottom value=0.1u (schematic designator Cu3_2)
Cu3_2_GM5 "Cap Semi" C1206 8124,2843 r0 bottom value=0.1u (schematic designator Cu3_2)
Cu3_2_GM6 "Cap Semi" C1206 9232,2843 r0 bottom value=0.1u (schematic designator Cu3_2)
Cu3_2_GM7 "Cap Semi" C1206 10340,2843 r0 bottom value=0.1u (schematic designator Cu3_2)
Cu3_2_GM8 "Cap Semi" C1206 11448,2843 r0 bottom value=0.1u (schematic designator Cu3_2)
Cu3_2_GM9 "Cap Semi" C1206 12556,2843 r0 bottom value=0.1u (schematic designator Cu3_2)
Cu4_1_GM1 "Cap Semi" C1206 2954,2265 r0 bottom value=0.1u (schematic designator Cu4_1)
Cu4_1_GM2 "Cap Semi" C1206 4071,2265 r0 bottom value=0.1u (schematic designator Cu4_1)
Cu4_1_GM3 "Cap Semi" C1206 5179,2265 r0 bottom value=0.1u (schematic designator Cu4_1)
Cu4_1_GM4 "Cap Semi" C1206 6287,2265 r0 bottom value=0.1u (schematic designator Cu4_1)
Cu4_1_GM5 "Cap Semi" C1206 7395,2265 r0 bottom value=0.1u (schematic designator Cu4_1)
Cu4_1_GM6 "Cap Semi" C1206 8503,2265 r0 bottom value=0.1u (schematic designator Cu4_1)
Cu4_1_GM7 "Cap Semi" C1206 9611,2265 r0 bottom value=0.1u (schematic designator Cu4_1)
Cu4_1_GM8 "Cap Semi" C1206 10719,2265 r0 bottom value=0.1u (schematic designator Cu4_1)
Cu4_1_GM9 "Cap Semi" C1206 11827,2265 r0 bottom value=0.1u (schematic designator Cu4_1)
Cu4_2_GM1 "Cap Semi" C1206 2930,2964 r0 top value=0.1u (schematic designator Cu4_2)
Cu4_2_GM2 "Cap Semi" C1206 4047,2964 r0 top value=0.1u (schematic designator Cu4_2)
Cu4_2_GM3 "Cap Semi" C1206 5155,2964 r0 top value=0.1u (schematic designator Cu4_2)
Cu4_2_GM4 "Cap Semi" C1206 6263,2964 r0 top value=0.1u (schematic designator Cu4_2)
Cu4_2_GM5 "Cap Semi" C1206 7371,2964 r0 top value=0.1u (schematic designator Cu4_2)
Cu4_2_GM6 "Cap Semi" C1206 8479,2964 r0 top value=0.1u (schematic designator Cu4_2)
Cu4_2_GM7 "Cap Semi" C1206 9587,2964 r0 top value=0.1u (schematic designator Cu4_2)
Cu4_2_GM8 "Cap Semi" C1206 10695,2964 r0 top value=0.1u (schematic designator Cu4_2)
Cu4_2_GM9 "Cap Semi" C1206 11803,2964 r0 top value=0.1u (schematic designator Cu4_2)
Cu5_1_GM1 "Cap Semi" C1206 3212,2261 r0 bottom value=0.1u (schematic designator Cu5_1)
Cu5_1_GM2 "Cap Semi" C1206 4329,2261 r0 bottom value=0.1u (schematic designator Cu5_1)
Cu5_1_GM3 "Cap Semi" C1206 5437,2261 r0 bottom value=0.1u (schematic designator Cu5_1)
Cu5_1_GM4 "Cap Semi" C1206 6545,2261 r0 bottom value=0.1u (schematic designator Cu5_1)
Cu5_1_GM5 "Cap Semi" C1206 7653,2261 r0 bottom value=0.1u (schematic designator Cu5_1)
Cu5_1_GM6 "Cap Semi" C1206 8761,2261 r0 bottom value=0.1u (schematic designator Cu5_1)
Cu5_1_GM7 "Cap Semi" C1206 9869,2261 r0 bottom value=0.1u (schematic designator Cu5_1)
Cu5_1_GM8 "Cap Semi" C1206 10977,2261 r0 bottom value=0.1u (schematic designator Cu5_1)
Cu5_1_GM9 "Cap Semi" C1206 12085,2261 r0 bottom value=0.1u (schematic designator Cu5_1)
Cu5_2_GM1 "Cap Semi" C1206 3209,2837 r180 top value=0.1u (schematic designator Cu5_2)
Cu5_2_GM2 "Cap Semi" C1206 4326,2837 r180 top value=0.1u (schematic designator Cu5_2)
Cu5_2_GM3 "Cap Semi" C1206 5434,2837 r180 top value=0.1u (schematic designator Cu5_2)
Cu5_2_GM4 "Cap Semi" C1206 6542,2837 r180 top value=0.1u (schematic designator Cu5_2)
Cu5_2_GM5 "Cap Semi" C1206 7650,2837 r180 top value=0.1u (schematic designator Cu5_2)
Cu5_2_GM6 "Cap Semi" C1206 8758,2837 r180 top value=0.1u (schematic designator Cu5_2)
Cu5_2_GM7 "Cap Semi" C1206 9866,2837 r180 top value=0.1u (schematic designator Cu5_2)
Cu5_2_GM8 "Cap Semi" C1206 10974,2837 r180 top value=0.1u (schematic designator Cu5_2)
Cu5_2_GM9 "Cap Semi" C1206 12082,2837 r180 top value=0.1u (schematic designator Cu5_2)
Cu8_1_GM1 "Cap Semi" 1608[0603] 2984.15,3169 r90 top value=2.2u (schematic designator Cu8_1)
Cu8_1_GM2 "Cap Semi" 1608[0603] 4101.15,3169 r90 top value=2.2u (schematic designator Cu8_1)
Cu8_1_GM3 "Cap Semi" 1608[0603] 5209.15,3169 r90 top value=2.2u (schematic designator Cu8_1)
Cu8_1_GM4 "Cap Semi" 1608[0603] 6317.15,3169 r90 top value=2.2u (schematic designator Cu8_1)
Cu8_1_GM5 "Cap Semi" 1608[0603] 7425.15,3169 r90 top value=2.2u (schematic designator Cu8_1)
Cu8_1_GM6 "Cap Semi" 1608[0603] 8533.15,3169 r90 top value=2.2u (schematic designator Cu8_1)
Cu8_1_GM7 "Cap Semi" 1608[0603] 9641.15,3169 r90 top value=2.2u (schematic designator Cu8_1)
Cu8_1_GM8 "Cap Semi" 1608[0603] 10749.15,3169 r90 top value=2.2u (schematic designator Cu8_1)
Cu8_1_GM9 "Cap Semi" 1608[0603] 11857.15,3169 r90 top value=2.2u (schematic designator Cu8_1)
Cu12_1 "Cap Semi" C1206 2005,2214 r0 bottom value=0.1u
Cu12_2 "Cap Semi" C1206 2002,2849 r0 bottom value=0.1u
Cu14_1 "Cap Semi" 1608[0603] 1867.15,3169 r90 top value=2.2u
Cu16_1 "Cap Semi" 1608[0603] 2099,3024 r90 top value=2.2u
Cu20_1_GM1 "Cap Semi" 1608[0603] 3216,3024 r90 top value=2.2u (schematic designator Cu20_1)
Cu20_1_GM2 "Cap Semi" 1608[0603] 4333,3024 r90 top value=2.2u (schematic designator Cu20_1)
Cu20_1_GM3 "Cap Semi" 1608[0603] 5441,3024 r90 top value=2.2u (schematic designator Cu20_1)
Cu20_1_GM4 "Cap Semi" 1608[0603] 6549,3024 r90 top value=2.2u (schematic designator Cu20_1)
Cu20_1_GM5 "Cap Semi" 1608[0603] 7657,3024 r90 top value=2.2u (schematic designator Cu20_1)
Cu20_1_GM6 "Cap Semi" 1608[0603] 8765,3024 r90 top value=2.2u (schematic designator Cu20_1)
Cu20_1_GM7 "Cap Semi" 1608[0603] 9873,3024 r90 top value=2.2u (schematic designator Cu20_1)
Cu20_1_GM8 "Cap Semi" 1608[0603] 10981,3024 r90 top value=2.2u (schematic designator Cu20_1)
Cu20_1_GM9 "Cap Semi" 1608[0603] 12089,3024 r90 top value=2.2u (schematic designator Cu20_1)
Cu74_1 "Cap Semi" C1206 12961,2257 r0 bottom value=0.1u
Cu74_2 "Cap Semi" C1206 12962,2904 r0 bottom value=0.1u
Cu75_1 "Cap Semi" 1608[0603] 12963,3112 r90 top value=2.2u
D5_GM1 "GSIJ_LTP" SE30PAJ-M3 3424,3478 r180 bottom (schematic designator D5)
D5_GM2 "GSIJ_LTP" SE30PAJ-M3 4541,3478 r180 bottom (schematic designator D5)
D5_GM3 "GSIJ_LTP" SE30PAJ-M3 5649,3478 r180 bottom (schematic designator D5)
D5_GM4 "GSIJ_LTP" SE30PAJ-M3 6757,3478 r180 bottom (schematic designator D5)
D5_GM5 "GSIJ_LTP" SE30PAJ-M3 7865,3478 r180 bottom (schematic designator D5)
D5_GM6 "GSIJ_LTP" SE30PAJ-M3 8973,3478 r180 bottom (schematic designator D5)
D5_GM7 "GSIJ_LTP" SE30PAJ-M3 10081,3478 r180 bottom (schematic designator D5)
D5_GM8 "GSIJ_LTP" SE30PAJ-M3 11189,3478 r180 bottom (schematic designator D5)
D5_GM9 "GSIJ_LTP" SE30PAJ-M3 12297,3478 r180 bottom (schematic designator D5)
D6_GM1 "GSIJ_LTP" SE30PAJ-M3 3069,2902 r270 top (schematic designator D6)
D6_GM2 "GSIJ_LTP" SE30PAJ-M3 4186,2902 r270 top (schematic designator D6)
D6_GM3 "GSIJ_LTP" SE30PAJ-M3 5294,2902 r270 top (schematic designator D6)
D6_GM4 "GSIJ_LTP" SE30PAJ-M3 6402,2902 r270 top (schematic designator D6)
D6_GM5 "GSIJ_LTP" SE30PAJ-M3 7510,2902 r270 top (schematic designator D6)
D6_GM6 "GSIJ_LTP" SE30PAJ-M3 8618,2902 r270 top (schematic designator D6)
D6_GM7 "GSIJ_LTP" SE30PAJ-M3 9726,2902 r270 top (schematic designator D6)
D6_GM8 "GSIJ_LTP" SE30PAJ-M3 10834,2902 r270 top (schematic designator D6)
D6_GM9 "GSIJ_LTP" SE30PAJ-M3 11942,2902 r270 top (schematic designator D6)
D12 "GSIJ_LTP" SE30PAJ-M3 2307,3478 r180 bottom
J1 "Header 2" PHEONIXCONTACT_1757242 2029,1785.85 r270 top
J2 "Header 3" 3_TEST_PIN 3239,1462.41 r90 top
J3 "Header 2" HVOUT 13232,3067 r0 top
J4 "Header 1" GNDOUT 13144,2113 r0 top
J5 "Header 1" GNDOUT 2333,1882 r0 top
J6 "Header 2" BatteryConnector_Molex_1720640002 2975,1502.4 r90 top
P1 "Header 6" HDR1X6 6669.5,579.5 r0 top
P2 "Header 6" HDR1X6 7716,625 r90 top
Q2 "IPN80R1K2P7" SOT233-3 12945,3379 r180 bottom
Q5_GM1 "IPN80R1K2P7" SOT233-3 3373,3511 r270 top (schematic designator Q5)
Q5_GM2 "IPN80R1K2P7" SOT233-3 4490,3511 r270 top (schematic designator Q5)
Q5_GM3 "IPN80R1K2P7" SOT233-3 5598,3511 r270 top (schematic designator Q5)
Q5_GM4 "IPN80R1K2P7" SOT233-3 6706,3511 r270 top (schematic designator Q5)
Q5_GM5 "IPN80R1K2P7" SOT233-3 7814,3511 r270 top (schematic designator Q5)
Q5_GM6 "IPN80R1K2P7" SOT233-3 8922,3511 r270 top (schematic designator Q5)
Q5_GM7 "IPN80R1K2P7" SOT233-3 10030,3511 r270 top (schematic designator Q5)
Q5_GM8 "IPN80R1K2P7" SOT233-3 11138,3511 r270 top (schematic designator Q5)
Q5_GM9 "IPN80R1K2P7" SOT233-3 12246,3511 r270 top (schematic designator Q5)
Q8_GM1 "IPN80R1K2P7" SOT233-3 3116.21,3569.88 r270 bottom (schematic designator Q8)
Q8_GM2 "IPN80R1K2P7" SOT233-3 4233.21,3569.88 r270 bottom (schematic designator Q8)
Q8_GM3 "IPN80R1K2P7" SOT233-3 5341.21,3569.88 r270 bottom (schematic designator Q8)
Q8_GM4 "IPN80R1K2P7" SOT233-3 6449.21,3569.88 r270 bottom (schematic designator Q8)
Q8_GM5 "IPN80R1K2P7" SOT233-3 7557.21,3569.88 r270 bottom (schematic designator Q8)
Q8_GM6 "IPN80R1K2P7" SOT233-3 8665.21,3569.88 r270 bottom (schematic designator Q8)
Q8_GM7 "IPN80R1K2P7" SOT233-3 9773.21,3569.88 r270 bottom (schematic designator Q8)
Q8_GM8 "IPN80R1K2P7" SOT233-3 10881.21,3569.88 r270 bottom (schematic designator Q8)
Q8_GM9 "IPN80R1K2P7" SOT233-3 11989.21,3569.88 r270 bottom (schematic designator Q8)
Q10_GM1 "IPN80R1K2P7" SOT233-3 3413,3157 r0 bottom (schematic designator Q10)
Q10_GM2 "IPN80R1K2P7" SOT233-3 4530,3157 r0 bottom (schematic designator Q10)
Q10_GM3 "IPN80R1K2P7" SOT233-3 5638,3157 r0 bottom (schematic designator Q10)
Q10_GM4 "IPN80R1K2P7" SOT233-3 6746,3157 r0 bottom (schematic designator Q10)
Q10_GM5 "IPN80R1K2P7" SOT233-3 7854,3157 r0 bottom (schematic designator Q10)
Q10_GM6 "IPN80R1K2P7" SOT233-3 8962,3157 r0 bottom (schematic designator Q10)
Q10_GM7 "IPN80R1K2P7" SOT233-3 10070,3157 r0 bottom (schematic designator Q10)
Q10_GM8 "IPN80R1K2P7" SOT233-3 11178,3157 r0 bottom (schematic designator Q10)
Q10_GM9 "IPN80R1K2P7" SOT233-3 12286,3157 r0 bottom (schematic designator Q10)
Q11_GM1 "IPN80R1K2P7" SOT233-3 2987,3528 r0 top (schematic designator Q11)
Q11_GM2 "IPN80R1K2P7" SOT233-3 4104,3528 r0 top (schematic designator Q11)
Q11_GM3 "IPN80R1K2P7" SOT233-3 5212,3528 r0 top (schematic designator Q11)
Q11_GM4 "IPN80R1K2P7" SOT233-3 6320,3528 r0 top (schematic designator Q11)
Q11_GM5 "IPN80R1K2P7" SOT233-3 7428,3528 r0 top (schematic designator Q11)
Q11_GM6 "IPN80R1K2P7" SOT233-3 8536,3528 r0 top (schematic designator Q11)
Q11_GM7 "IPN80R1K2P7" SOT233-3 9644,3528 r0 top (schematic designator Q11)
Q11_GM8 "IPN80R1K2P7" SOT233-3 10752,3528 r0 top (schematic designator Q11)
Q11_GM9 "IPN80R1K2P7" SOT233-3 11860,3528 r0 top (schematic designator Q11)
Q12_GM1 "IPN80R1K2P7" SOT233-3 3198.28,3216.13 r90 top (schematic designator Q12)
Q12_GM2 "IPN80R1K2P7" SOT233-3 4315.28,3216.13 r90 top (schematic designator Q12)
Q12_GM3 "IPN80R1K2P7" SOT233-3 5423.28,3216.13 r90 top (schematic designator Q12)
Q12_GM4 "IPN80R1K2P7" SOT233-3 6531.28,3216.13 r90 top (schematic designator Q12)
Q12_GM5 "IPN80R1K2P7" SOT233-3 7639.28,3216.13 r90 top (schematic designator Q12)
Q12_GM6 "IPN80R1K2P7" SOT233-3 8747.28,3216.13 r90 top (schematic designator Q12)
Q12_GM7 "IPN80R1K2P7" SOT233-3 9855.28,3216.13 r90 top (schematic designator Q12)
Q12_GM8 "IPN80R1K2P7" SOT233-3 10963.28,3216.13 r90 top (schematic designator Q12)
Q12_GM9 "IPN80R1K2P7" SOT233-3 12071.28,3216.13 r90 top (schematic designator Q12)
Q45 "IPN80R1K2P7" SOT233-3 2256,3511 r270 top
Q48 "IPN80R1K2P7" SOT233-3 1999.21,3569.88 r270 bottom
Q49 "IPN80R1K2P7" SOT233-3 2296,3157 r0 bottom
Q50 "IPN80R1K2P7" SOT233-3 2081.28,3216.13 r90 top
R1 "10" 1608[0603] 2238,3698.38 r270 bottom value=10K
R2 "10" 1608[0603] 2070,2128 r0 bottom value=10K
R4 "10" 1608[0603] 2070,2065 r0 bottom value=10K
R6 "10" 1608[0603] 2309,3127.45 r180 top value=10K
R8 "10" 1608[0603] 2092,3273 r0 bottom value=10K
R10 "10" 1608[0603] 2045,3501 r90 top value=10K
R16_GM1 "10" 1608[0603] 3719,2106 r0 bottom value=10K (schematic designator R16)
R16_GM2 "10" 1608[0603] 4836,2106 r0 bottom value=10K (schematic designator R16)
R16_GM3 "10" 1608[0603] 5944,2106 r0 bottom value=10K (schematic designator R16)
R16_GM4 "10" 1608[0603] 6997,2106 r180 bottom value=10K (schematic designator R16)
R16_GM5 "10" 1608[0603] 8107,2109 r180 bottom value=10K (schematic designator R16)
R16_GM6 "10" 1608[0603] 9212,2117 r180 bottom value=10K (schematic designator R16)
R16_GM7 "10" 1608[0603] 10321,2111 r180 bottom value=10K (schematic designator R16)
R16_GM8 "10" 1608[0603] 11423,2106 r180 bottom value=10K (schematic designator R16)
R16_GM9 "10" 1608[0603] 12539,2106 r180 bottom value=10K (schematic designator R16)
R17_GM1 "10" 1608[0603] 2980,2161 r270 bottom value=10K (schematic designator R17)
R17_GM2 "10" 1608[0603] 4097,2161 r270 bottom value=10K (schematic designator R17)
R17_GM3 "10" 1608[0603] 5205,2161 r270 bottom value=10K (schematic designator R17)
R17_GM4 "10" 1608[0603] 6313,2161 r270 bottom value=10K (schematic designator R17)
R17_GM5 "10" 1608[0603] 7421,2161 r270 bottom value=10K (schematic designator R17)
R17_GM6 "10" 1608[0603] 8529,2161 r270 bottom value=10K (schematic designator R17)
R17_GM7 "10" 1608[0603] 9637,2161 r270 bottom value=10K (schematic designator R17)
R17_GM8 "10" 1608[0603] 10745,2161 r270 bottom value=10K (schematic designator R17)
R17_GM9 "10" 1608[0603] 11853,2161 r270 bottom value=10K (schematic designator R17)
R18_GM1 "10" 1608[0603] 2924,2161 r90 bottom value=10K (schematic designator R18)
R18_GM2 "10" 1608[0603] 4041,2161 r90 bottom value=10K (schematic designator R18)
R18_GM3 "10" 1608[0603] 5149,2161 r90 bottom value=10K (schematic designator R18)
R18_GM4 "10" 1608[0603] 6257,2161 r90 bottom value=10K (schematic designator R18)
R18_GM5 "10" 1608[0603] 7365,2161 r90 bottom value=10K (schematic designator R18)
R18_GM6 "10" 1608[0603] 8473,2161 r90 bottom value=10K (schematic designator R18)
R18_GM7 "10" 1608[0603] 9581,2161 r90 bottom value=10K (schematic designator R18)
R18_GM8 "10" 1608[0603] 10689,2161 r90 bottom value=10K (schematic designator R18)
R18_GM9 "10" 1608[0603] 11797,2161 r90 bottom value=10K (schematic designator R18)
R19_GM1 "10" 1608[0603] 3244,2161 r270 bottom value=10K (schematic designator R19)
R19_GM2 "10" 1608[0603] 4361,2161 r270 bottom value=10K (schematic designator R19)
R19_GM3 "10" 1608[0603] 5469,2161 r270 bottom value=10K (schematic designator R19)
R19_GM4 "10" 1608[0603] 6577,2161 r270 bottom value=10K (schematic designator R19)
R19_GM5 "10" 1608[0603] 7685,2161 r270 bottom value=10K (schematic designator R19)
R19_GM6 "10" 1608[0603] 8793,2161 r270 bottom value=10K (schematic designator R19)
R19_GM7 "10" 1608[0603] 9901,2161 r270 bottom value=10K (schematic designator R19)
R19_GM8 "10" 1608[0603] 11009,2161 r270 bottom value=10K (schematic designator R19)
R19_GM9 "10" 1608[0603] 12117,2161 r270 bottom value=10K (schematic designator R19)
R20_GM1 "10" 1608[0603] 3181,2161 r270 bottom value=10K (schematic designator R20)
R20_GM2 "10" 1608[0603] 4298,2161 r270 bottom value=10K (schematic designator R20)
R20_GM3 "10" 1608[0603] 5406,2161 r270 bottom value=10K (schematic designator R20)
R20_GM4 "10" 1608[0603] 6514,2161 r270 bottom value=10K (schematic designator R20)
R20_GM5 "10" 1608[0603] 7622,2161 r270 bottom value=10K (schematic designator R20)
R20_GM6 "10" 1608[0603] 8730,2161 r270 bottom value=10K (schematic designator R20)
R20_GM7 "10" 1608[0603] 9838,2161 r270 bottom value=10K (schematic designator R20)
R20_GM8 "10" 1608[0603] 10946,2161 r270 bottom value=10K (schematic designator R20)
R20_GM9 "10" 1608[0603] 12054,2161 r270 bottom value=10K (schematic designator R20)
R21_GM1 "10" 1608[0603] 3355,3698.38 r270 bottom value=10K (schematic designator R21)
R21_GM2 "10" 1608[0603] 4472,3698.38 r270 bottom value=10K (schematic designator R21)
R21_GM3 "10" 1608[0603] 5580,3698.38 r270 bottom value=10K (schematic designator R21)
R21_GM4 "10" 1608[0603] 6688,3698.38 r270 bottom value=10K (schematic designator R21)
R21_GM5 "10" 1608[0603] 7796,3698.38 r270 bottom value=10K (schematic designator R21)
R21_GM6 "10" 1608[0603] 8904,3698.38 r270 bottom value=10K (schematic designator R21)
R21_GM7 "10" 1608[0603] 10012,3698.38 r270 bottom value=10K (schematic designator R21)
R21_GM8 "10" 1608[0603] 11120,3698.38 r270 bottom value=10K (schematic designator R21)
R21_GM9 "10" 1608[0603] 12228,3698.38 r270 bottom value=10K (schematic designator R21)
R22_GM1 "10" 1608[0603] 2936,3324 r180 top value=10K (schematic designator R22)
R22_GM2 "10" 1608[0603] 4053,3324 r180 top value=10K (schematic designator R22)
R22_GM3 "10" 1608[0603] 5161,3324 r180 top value=10K (schematic designator R22)
R22_GM4 "10" 1608[0603] 6269,3324 r180 top value=10K (schematic designator R22)
R22_GM5 "10" 1608[0603] 7377,3324 r180 top value=10K (schematic designator R22)
R22_GM6 "10" 1608[0603] 8485,3324 r180 top value=10K (schematic designator R22)
R22_GM7 "10" 1608[0603] 9593,3324 r180 top value=10K (schematic designator R22)
R22_GM8 "10" 1608[0603] 10701,3324 r180 top value=10K (schematic designator R22)
R22_GM9 "10" 1608[0603] 11809,3324 r180 top value=10K (schematic designator R22)
R23_GM1 "10" 1608[0603] 3162,3501 r90 top value=10K (schematic designator R23)
R23_GM2 "10" 1608[0603] 4279,3501 r90 top value=10K (schematic designator R23)
R23_GM3 "10" 1608[0603] 5387,3501 r90 top value=10K (schematic designator R23)
R23_GM4 "10" 1608[0603] 6495,3501 r90 top value=10K (schematic designator R23)
R23_GM5 "10" 1608[0603] 7603,3501 r90 top value=10K (schematic designator R23)
R23_GM6 "10" 1608[0603] 8711,3501 r90 top value=10K (schematic designator R23)
R23_GM7 "10" 1608[0603] 9819,3501 r90 top value=10K (schematic designator R23)
R23_GM8 "10" 1608[0603] 10927,3501 r90 top value=10K (schematic designator R23)
R23_GM9 "10" 1608[0603] 12035,3501 r90 top value=10K (schematic designator R23)
R24_GM1 "10" 1608[0603] 3426,3127.45 r180 top value=10K (schematic designator R24)
R24_GM2 "10" 1608[0603] 4543,3127.45 r180 top value=10K (schematic designator R24)
R24_GM3 "10" 1608[0603] 5651,3127.45 r180 top value=10K (schematic designator R24)
R24_GM4 "10" 1608[0603] 6759,3127.45 r180 top value=10K (schematic designator R24)
R24_GM5 "10" 1608[0603] 7867,3127.45 r180 top value=10K (schematic designator R24)
R24_GM6 "10" 1608[0603] 8975,3127.45 r180 top value=10K (schematic designator R24)
R24_GM7 "10" 1608[0603] 10083,3127.45 r180 top value=10K (schematic designator R24)
R24_GM8 "10" 1608[0603] 11191,3127.45 r180 top value=10K (schematic designator R24)
R24_GM9 "10" 1608[0603] 12299,3127.45 r180 top value=10K (schematic designator R24)
R25_GM1 "10" 1608[0603] 3209,3273 r0 bottom value=10K (schematic designator R25)
R25_GM2 "10" 1608[0603] 4326,3273 r0 bottom value=10K (schematic designator R25)
R25_GM3 "10" 1608[0603] 5434,3273 r0 bottom value=10K (schematic designator R25)
R25_GM4 "10" 1608[0603] 6542,3273 r0 bottom value=10K (schematic designator R25)
R25_GM5 "10" 1608[0603] 7650,3273 r0 bottom value=10K (schematic designator R25)
R25_GM6 "10" 1608[0603] 8758,3273 r0 bottom value=10K (schematic designator R25)
R25_GM7 "10" 1608[0603] 9866,3273 r0 bottom value=10K (schematic designator R25)
R25_GM8 "10" 1608[0603] 10974,3273 r0 bottom value=10K (schematic designator R25)
R25_GM9 "10" 1608[0603] 12082,3273 r0 bottom value=10K (schematic designator R25)
R26 "Res3" J1-0603 7085.5,670.5 r180 top value=10K
R27 "Res3" J1-0603 7196,670.5 r180 top value=220
R28 "Res3" J1-0603 6801.5,686.5 r90 top value=49.9
R29 "Res3" J1-0603 6745.94,687.5 r90 top value=49.9
R98 "10" 1608[0603] 12965,2140 r270 bottom value=10K
R99 "10" 1608[0603] 13021,3180 r0 bottom value=10K
Rr4 "10" 1608[0603] 2602,2115 r0 bottom value=10K
U1 "MAX17601" DFN-8_DD 2371,3652 r90 bottom
U2_GM1 "MAX17601" DFN-8_DD 3488,3652 r90 bottom (schematic designator U2)
U2_GM2 "MAX17601" DFN-8_DD 4605,3652 r90 bottom (schematic designator U2)
U2_GM3 "MAX17601" DFN-8_DD 5713,3652 r90 bottom (schematic designator U2)
U2_GM4 "MAX17601" DFN-8_DD 6821,3652 r90 bottom (schematic designator U2)
U2_GM5 "MAX17601" DFN-8_DD 7929,3652 r90 bottom (schematic designator U2)
U2_GM6 "MAX17601" DFN-8_DD 9037,3652 r90 bottom (schematic designator U2)
U2_GM7 "MAX17601" DFN-8_DD 10145,3652 r90 bottom (schematic designator U2)
U2_GM8 "MAX17601" DFN-8_DD 11253,3652 r90 bottom (schematic designator U2)
U2_GM9 "MAX17601" DFN-8_DD 12361,3652 r90 bottom (schematic designator U2)
U3_GM1 "ISO7720FDWV" TI_DWV 3741,2320 r90 bottom (schematic designator U3)
U3_GM2 "ISO7720FDWV" TI_DWV 4858,2320 r90 bottom (schematic designator U3)
U3_GM3 "ISO7720FDWV" TI_DWV 5966,2320 r90 bottom (schematic designator U3)
U3_GM4 "ISO7720FDWV" TI_DWV 7074,2320 r90 bottom (schematic designator U3)
U3_GM5 "ISO7720FDWV" TI_DWV 8182,2320 r90 bottom (schematic designator U3)
U3_GM6 "ISO7720FDWV" TI_DWV 9290,2320 r90 bottom (schematic designator U3)
U3_GM7 "ISO7720FDWV" TI_DWV 10398,2320 r90 bottom (schematic designator U3)
U3_GM8 "ISO7720FDWV" TI_DWV 11506,2320 r90 bottom (schematic designator U3)
U3_GM9 "ISO7720FDWV" TI_DWV 12614,2320 r90 bottom (schematic designator U3)
U4_GM1 "ISO7720FDWV" TI_DWV 3028.28,2355 r90 bottom (schematic designator U4)
U4_GM2 "ISO7720FDWV" TI_DWV 4145.28,2355 r90 bottom (schematic designator U4)
U4_GM3 "ISO7720FDWV" TI_DWV 5253.28,2355 r90 bottom (schematic designator U4)
U4_GM4 "ISO7720FDWV" TI_DWV 6361.28,2355 r90 bottom (schematic designator U4)
U4_GM5 "ISO7720FDWV" TI_DWV 7469.28,2355 r90 bottom (schematic designator U4)
U4_GM6 "ISO7720FDWV" TI_DWV 8577.28,2355 r90 bottom (schematic designator U4)
U4_GM7 "ISO7720FDWV" TI_DWV 9685.28,2355 r90 bottom (schematic designator U4)
U4_GM8 "ISO7720FDWV" TI_DWV 10793.28,2355 r90 bottom (schematic designator U4)
U4_GM9 "ISO7720FDWV" TI_DWV 11901.28,2355 r90 bottom (schematic designator U4)
U5_GM1 "ISO7720FDWV" TI_DWV 3285,2355 r90 bottom (schematic designator U5)
U5_GM2 "ISO7720FDWV" TI_DWV 4402,2355 r90 bottom (schematic designator U5)
U5_GM3 "ISO7720FDWV" TI_DWV 5510,2355 r90 bottom (schematic designator U5)
U5_GM4 "ISO7720FDWV" TI_DWV 6618,2355 r90 bottom (schematic designator U5)
U5_GM5 "ISO7720FDWV" TI_DWV 7726,2355 r90 bottom (schematic designator U5)
U5_GM6 "ISO7720FDWV" TI_DWV 8834,2355 r90 bottom (schematic designator U5)
U5_GM7 "ISO7720FDWV" TI_DWV 9942,2355 r90 bottom (schematic designator U5)
U5_GM8 "ISO7720FDWV" TI_DWV 11050,2355 r90 bottom (schematic designator U5)
U5_GM9 "ISO7720FDWV" TI_DWV 12158,2355 r90 bottom (schematic designator U5)
U6_GM1 "ADuM6000" SOIC127P1030X265-16N 3045,2507 r90 top (schematic designator U6)
U6_GM2 "ADuM6000" SOIC127P1030X265-16N 4162,2507 r90 top (schematic designator U6)
U6_GM3 "ADuM6000" SOIC127P1030X265-16N 5270,2507 r90 top (schematic designator U6)
U6_GM4 "ADuM6000" SOIC127P1030X265-16N 6378,2507 r90 top (schematic designator U6)
U6_GM5 "ADuM6000" SOIC127P1030X265-16N 7486,2507 r90 top (schematic designator U6)
U6_GM6 "ADuM6000" SOIC127P1030X265-16N 8594,2507 r90 top (schematic designator U6)
U6_GM7 "ADuM6000" SOIC127P1030X265-16N 9702,2507 r90 top (schematic designator U6)
U6_GM8 "ADuM6000" SOIC127P1030X265-16N 10810,2507 r90 top (schematic designator U6)
U6_GM9 "ADuM6000" SOIC127P1030X265-16N 11918,2507 r90 top (schematic designator U6)
U8_GM1 "MAX17601" DFN-8_DD 2994.52,3121.14 r90 bottom (schematic designator U8)
U8_GM2 "MAX17601" DFN-8_DD 4111.52,3121.14 r90 bottom (schematic designator U8)
U8_GM3 "MAX17601" DFN-8_DD 5219.52,3121.14 r90 bottom (schematic designator U8)
U8_GM4 "MAX17601" DFN-8_DD 6327.52,3121.14 r90 bottom (schematic designator U8)
U8_GM5 "MAX17601" DFN-8_DD 7435.52,3121.14 r90 bottom (schematic designator U8)
U8_GM6 "MAX17601" DFN-8_DD 8543.52,3121.14 r90 bottom (schematic designator U8)
U8_GM7 "MAX17601" DFN-8_DD 9651.52,3121.14 r90 bottom (schematic designator U8)
U8_GM8 "MAX17601" DFN-8_DD 10759.52,3121.14 r90 bottom (schematic designator U8)
U8_GM9 "MAX17601" DFN-8_DD 11867.52,3121.14 r90 bottom (schematic designator U8)
U12 "ISO7720FDWV" TI_DWV 2076,2319 r90 bottom
U14 "MAX17601" DFN-8_DD 1877.52,3121.14 r90 bottom
U16 "MAX17601" DFN-8_DD 2072,3015 r90 bottom
U20_GM1 "MAX17601" DFN-8_DD 3189,3015 r90 bottom (schematic designator U20)
U20_GM2 "MAX17601" DFN-8_DD 4306,3015 r90 bottom (schematic designator U20)
U20_GM3 "MAX17601" DFN-8_DD 5414,3015 r90 bottom (schematic designator U20)
U20_GM4 "MAX17601" DFN-8_DD 6522,3015 r90 bottom (schematic designator U20)
U20_GM5 "MAX17601" DFN-8_DD 7630,3015 r90 bottom (schematic designator U20)
U20_GM6 "MAX17601" DFN-8_DD 8738,3015 r90 bottom (schematic designator U20)
U20_GM7 "MAX17601" DFN-8_DD 9846,3015 r90 bottom (schematic designator U20)
U20_GM8 "MAX17601" DFN-8_DD 10954,3015 r90 bottom (schematic designator U20)
U20_GM9 "MAX17601" DFN-8_DD 12062,3015 r90 bottom (schematic designator U20)
U21 "ADuM6000" SOIC127P1030X265-16N 13034,2507 r90 top
U22 "DSPIC33FJ256GP510" TQFP100_12X12MC- 6963.38,1043.66 r270 bottom value=Value
U24 "AZ1117E" SOT223 6310,1797.09 r180 top
U74 "ISO7720FDWV" TI_DWV 13015,2365 r90 bottom
U75 "MAX17601" DFN-8_DD 12975,3067 r90 bottom
Ur1_GM1 "ADUM5028-5BRIZ" RI_8_1 3544,2790 r0 top value=Value (schematic designator Ur1)
Ur1_GM2 "ADUM5028-5BRIZ" RI_8_1 4661,2790 r0 top value=Value (schematic designator Ur1)
Ur1_GM3 "ADUM5028-5BRIZ" RI_8_1 5769,2790 r0 top value=Value (schematic designator Ur1)